# Altium PCB PCB1.PcbDoc
Units mm, origin at the board's own origin, x right, y up, seen from the top; angles counter-clockwise.
Board outline 49.15 x 59.31 mm, 2 copper layers (Top Layer, Bottom Layer); 22 components, 31 nets, 136 pads, 0 vias.
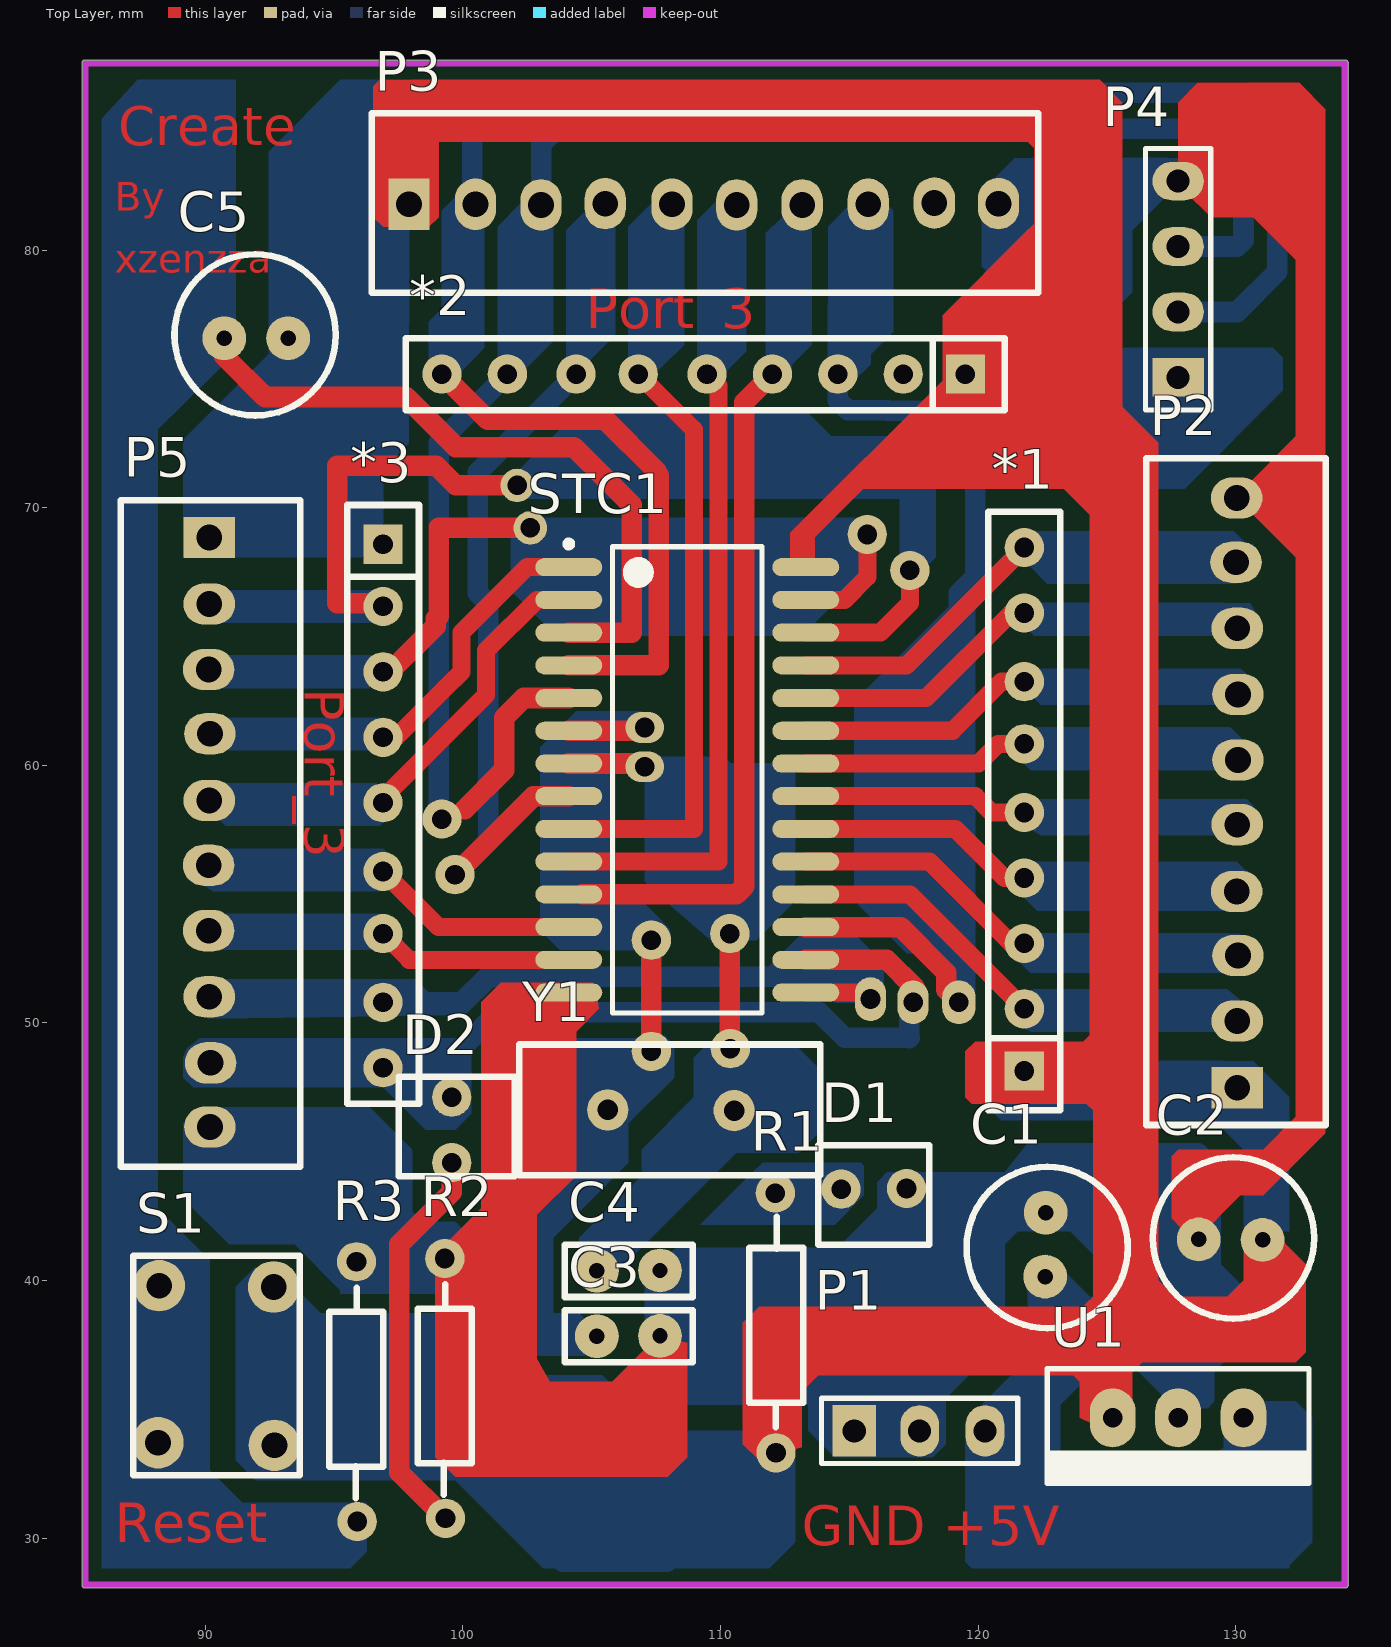
[diagram p0: Top Layer view]
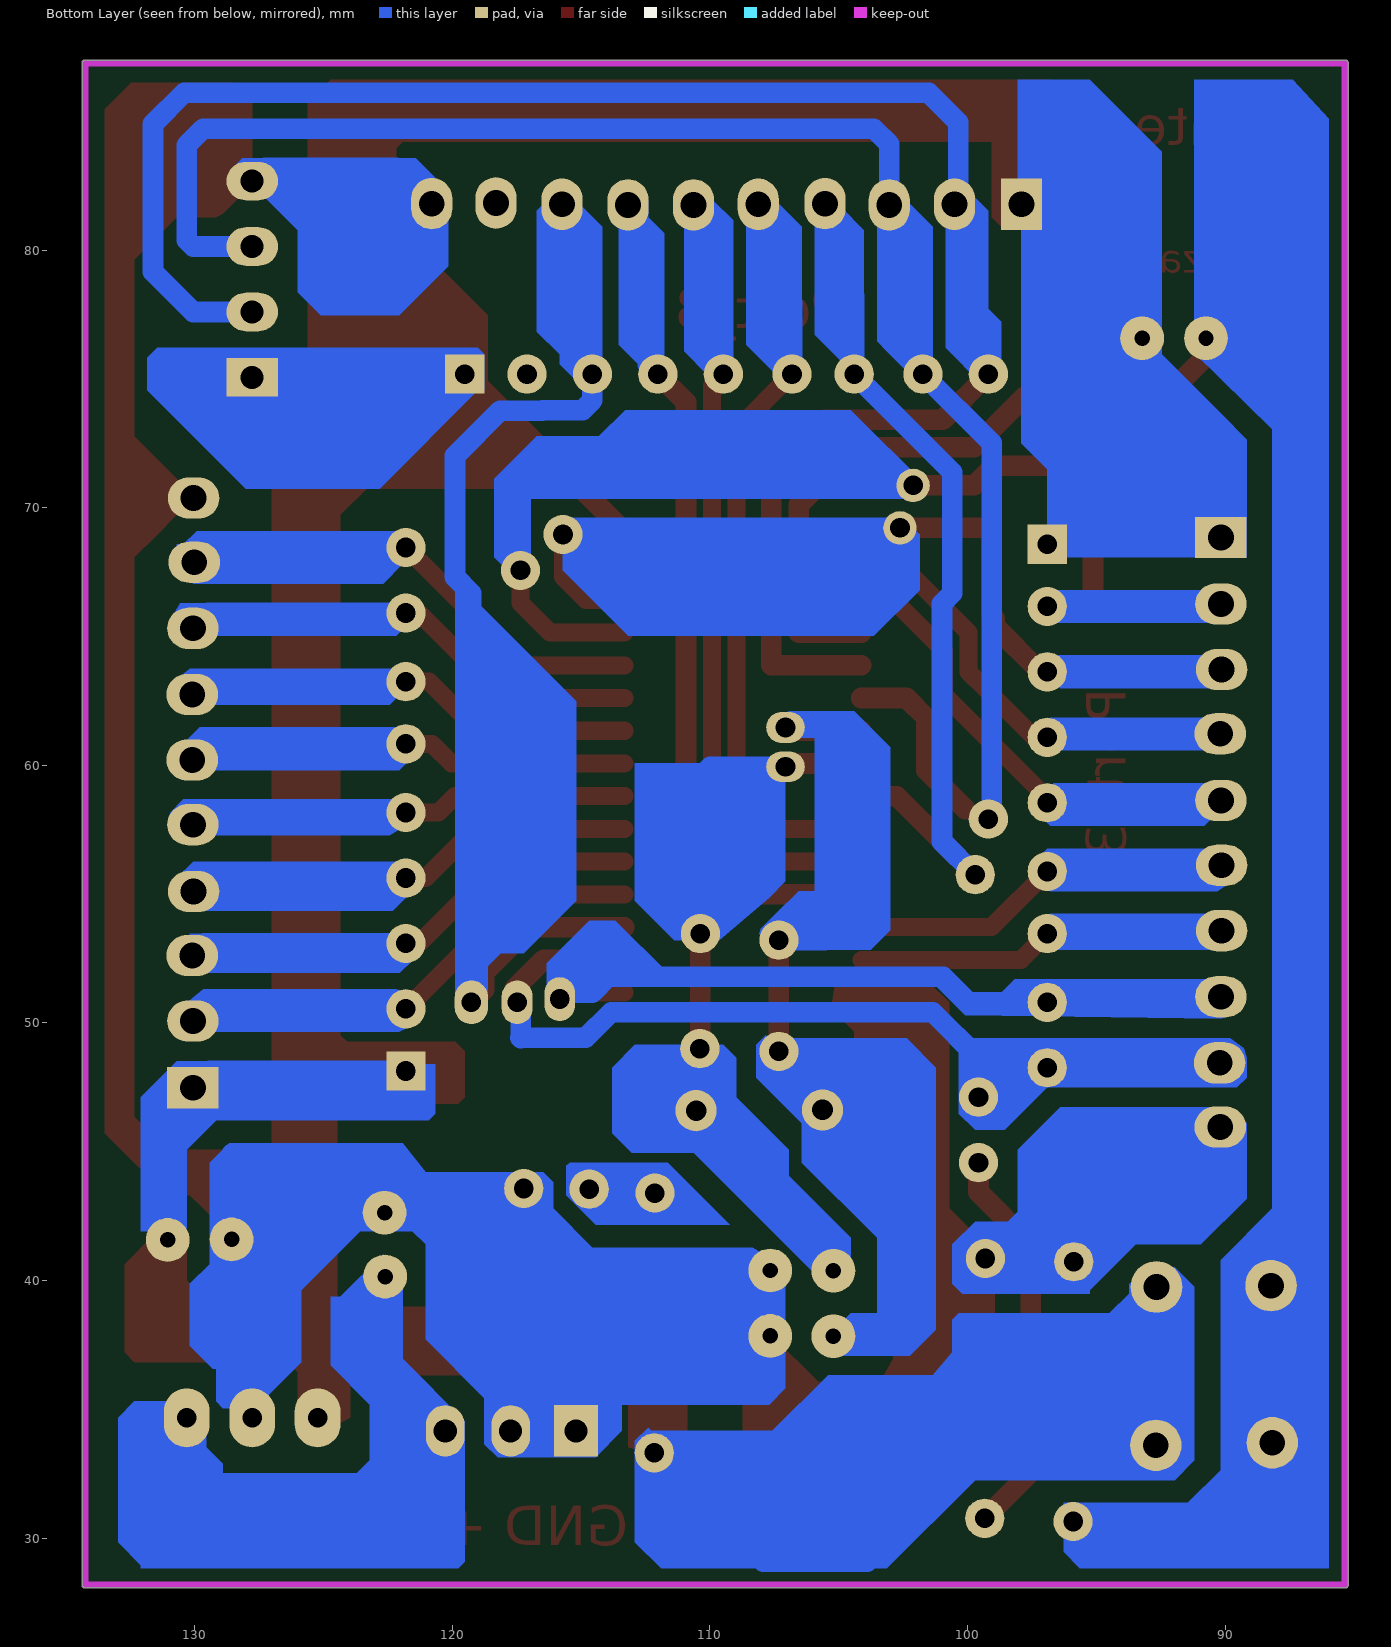
[diagram p1: Bottom Layer view, seen from below]
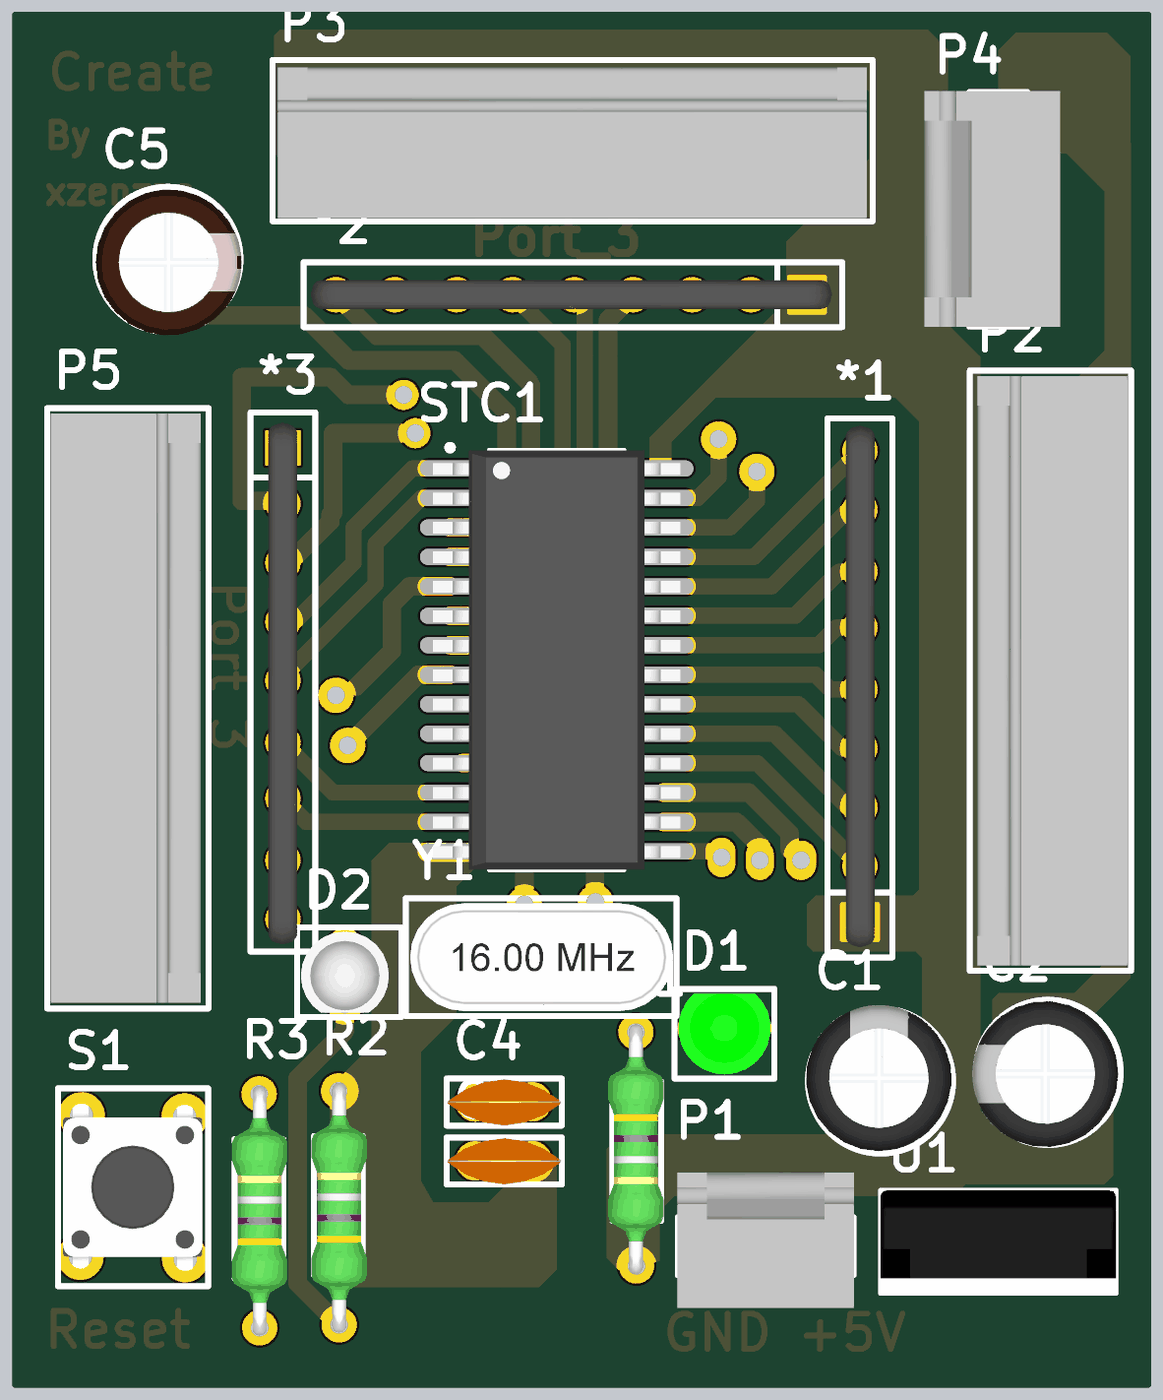
[diagram p2: 3D render of the assembled board from above, using the file's embedded part models]

## Layer stack, top to bottom
Top Solder: solder mask 0.0102, Solder Resist, Dk 3.5
Top Layer: signal copper 0.0356
Dielectric 1: dielectric 0.32, FR-4, Dk 4.8
Bottom Layer: signal copper 0.0356
Bottom Solder: solder mask 0.0102, Solder Resist, Dk 3.5

## Board outline
85.217,28.194 ccw(c85.344,28.194) 85.344,28.067 134.239,28.067 ccw(c134.239,28.194) 134.366,28.194 134.366,87.249 ccw(c134.239,87.249) 134.239,87.376 85.344,87.376 ccw(c85.344,87.249) 85.217,87.249

## Design rules (kind name [scope] priority, off if disabled: settings)
Clearance [All] p1: gap=0.254
PolygonConnect [All] p1: connectstyle=Relief reliefconductorwidth=0.254 reliefentries=4 polygonreliefangle="90 Angle" airgapwidth=0.254
RoutingVias [All] p1: holewidth=0.711 width=1.27 viastyle="Through Hole" minholewidth=0.711 minwidth=1.27 maxholewidth=0.711 maxwidth=1.27
SolderMaskExpansion [All] p1: expansion=0.102
Width [All] p1: maxlimit=1 minlimit=0.7 preferedwidth=0.9 toplayer_maxwidth=0.9 toplayer_prefwidth=0.8 bottomlayer_minwidth=0.8 minimp=50.000000 maximp=50.000000 favimp=50.000000
30 further rules are at their usual default settings.

## Components (designator, comment, footprint, x,y, rotation, side; value= is the part's Value field where it differs from the comment)
*1 "RES_Network" RES_NETWORK 121.793,58.293 r90 top
*2 "RES_Network" RES_NETWORK 109.347,75.184 r180 top
*3 "RES_Network" RES_NETWORK 96.901,58.42 r270 top
C1 "Cap Pol3" CAPA2.5EB 122.682,41.275 r270 top
C2 "Cap Pol3" CAPA2.5EB 129.921,41.656 r0 top
C3 "Cap" cap2.5mmceramic 106.426,37.846 r0 top
C4 "Cap" cap2.5mmceramic 106.426,40.386 r0 top
C5 "Cap Pol1" CAPA2.5EBR 91.948,76.708 r0 top
D1 "LED0" ledgreen 115.951,43.561 r180 top
D2 "LED0" ledred 99.568,45.847 r0 top
P1 "Header 3" HDR1X3_MTA 115.189,34.163 r0 top
P2 "Connector10" PIN10 130.048,58.928 r90 top
P3 "Connector10" PIN10 109.347,81.788 r0 top
P4 "Header 4" HDR1X4_MTA 127.762,75.057 r90 top
P5 "Connector10" PIN10 90.17,57.404 r270 top
R1 "Res1" RES- 112.141,38.354 r90 top
R2 "Res1" RES- 99.314,35.814 r270 top
R3 "Res1" RES- 95.885,35.687 r270 top
S1 "SW-SPST" SWITCHBUTTON 90.424,36.703 r90 top
STC1 "STC12C5608AD" SO28_M 108.712,59.436 r0 top
U1 "LT78XX" to220ab 127.762,34.671 r180 top
Y1 "XTAL" Crystal 108.077,46.609 r0 top

## Footprints (in the part's own frame and the unit in brackets; to place one, negate y for a bottom-side part, rotate by r counter-clockwise, add the part's x,y. Pads: shape width x height; smd on the part's side, far side on the other; paste and mask are expansions set on the pad)
cap2.5mmceramic [mm]
  round 1.7 hole 0.6: 1(1.225,0.005) 2(-1.225,-0.005)
  silkscreen extent -2.46,-1.02 2.51,1.01, body extent -2.43,-1.02 2.48,0.98, height 5.45
CAPA2.5EB [mm]
  round 1.7 hole 0.6: 1(1.12,-0.08) 2(-1.36,-0.06)
  silkscreen extent -3.14,-3.13 3.12,3.13, body extent -3.28,-3.22 3.02,3.08, height 2.7
CAPA2.5EBR [mm]
  round 1.7 hole 0.6: 1(1.27,-0.13) 2(-1.21,-0.13)
  silkscreen extent -3.14,-3.13 3.12,3.13, body extent -3.13,-3.27 3.17,3.01, height 2.5
Crystal [mm]
  round 1.6 hole 0.8: 1(2.454,-0.014) 2(-2.454,0.014)
  silkscreen extent -5.88,-2.53 5.8,2.55, body extent -5.68,-2.31 5.65,2.34, height 3.8
HDR1X3_MTA [mm] "Connector; Header; 3 Position"
  rect 1.7x2 hole 0.9: 1(0,0)
  oval 1.5x2 hole 0.9: 2(2.54,0) 3(5.08,0)
  silkscreen extent -1.27,-1.27 6.35,1.27, body extent -1.27,-2.66 6.35,3.18, height 2.86
HDR1X4_MTA [mm] "Connector; Header; 4 Position"
  rect 1.5x2 hole 0.9: 1(0,0)
  oval 1.5x2 hole 0.9: 2(2.54,0) 3(5.08,0) 4(7.62,0)
  silkscreen extent -1.27,-1.27 8.89,1.27, body extent -1.26,-2.66 8.9,3.18, height 10.03
ledgreen [mil]
  round 60 hole 30: 1(50,0.5) 2(-50,-0.5)
  silkscreen extent -85,-67 85,86, body extent -78,-59 78,79, height 212
ledred [mil]
  round 60 hole 30: 1(0,50) 2(0,-50)
  silkscreen extent -81,-71 96,81, body extent -75,-64 75,74, height 256
PIN10 [mm]
  rect 1.6x2 hole 1: 1(-11.443,-0.013)
  oval 1.6x2 hole 1: 2(-8.852,-0.013) 3(-6.312,-0.038) 4(-3.823,0.013) 5(-1.232,-0.013) 6(1.283,-0.038) 7(3.823,-0.038) 8(6.388,-0.013) 9(8.954,0.038) 10(11.443,0.013)
  silkscreen extent -12.89,-3.44 12.99,3.52, body extent -12.66,-3.29 12.74,3.19, height 3.1
RES- [mil]
  round 60 hole 30: 1(-198.5,-0.5) 2(198.5,0.5)
  silkscreen extent -159,-42 163,41, body extent -212,-47 211,48, height 95
RES_NETWORK [mil]
  rect 60x60 hole 30: 1(-400,0)
  round 60 hole 30: 2(-305,0) 3(-205,0) 4(-105,0) 5(-5,0) 6(100,0) 7(195,0) 8(300,0) 9(400,0)
  silkscreen extent -460,-55 455,55, body extent -443,-25 443,24, height 209
SO28_M [mm] "SOIC, 28-Leads, Body 17.9x7.5mm, Pitch 1.27mm, IPC Low Density"
  oval 2.6x0.7 smd: 1(-4.6,8.255) 2(-4.6,6.985) 3(-4.6,5.715) 4(-4.6,4.445) 5(-4.6,3.175) 6(-4.6,1.905) 7(-4.6,0.635) 8(-4.6,-0.635) 9(-4.6,-1.905) 10(-4.6,-3.175) 11(-4.6,-4.445) 12(-4.6,-5.715) 13(-4.6,-6.985) 14(-4.6,-8.255) 15(4.6,-8.255) 16(4.6,-6.985) 17(4.6,-5.715) 18(4.6,-4.445) 19(4.6,-3.175) 20(4.6,-1.905) 21(4.6,-0.635) 22(4.6,0.635) 23(4.6,1.905) 24(4.6,3.175) 25(4.6,4.445) 26(4.6,5.715) 27(4.6,6.985) 28(4.6,8.255)
  silkscreen extent -4.72,-9.05 2.9,9.28, body extent -5.34,-9.04 5.33,9.04, height 2.39
SWITCHBUTTON [mm]
  round 2 hole 1: 1(-2.997,2.261) 1(3.099,2.21) 2(-3.099,-2.261) 2(3.048,-2.235)
  silkscreen extent -4.27,-3.25 4.27,3.23, body extent -3.99,-3 3.99,3, height 4.9
to220ab [mil]
  oval 70x90 hole 30: 1(-100,0) 2(0,0) 3(100,0)
  silkscreen extent -200,-75 200,100, body extent -200,-75 200,75, height 750

## Part data
C1 C2: "Polarized Capacitor (Surface Mount)"
C3 C4: "Capacitor"
C5: "Polarized Capacitor (Radial)"
D1 D2: "Typical INFRARED GaAs LED"
P1: "Header, 3-Pin"
P2 P3 P5: "Header, 10-Pin"
P4: "Header, 4-Pin"
R1 R2 R3: "Resistor"
S1: "Single-Pole, Single-Throw Switch"
U1: library part 78XX
Y1: "Crystal Oscillator"

## Free pads (board coordinates)
  round 1.524 hole 0.762: 13(117.348,67.564) 17(107.315,53.213) 18(110.363,53.467) 21(99.695,55.753) 22(99.187,57.912) 23(115.697,68.961) 28(107.315,48.895) 29(110.384,49.001)
  oval 1.3x1.7 hole 0.762: 14(119.253,50.8)
  oval 1.2x1.7 hole 0.762: 15(115.824,50.927) 16(117.475,50.8)
  oval 1.5x1.2 hole 0.762: 19(107.061,59.944) 20(107.061,61.468)
  round 1.3 hole 0.762: 26(102.108,70.866) 27(102.616,69.215)

## Nets (pads, with @x,y where several pads share a name; then routed paths per layer and width w, separated by ;. In a path a pad name is that pad's centre, name@x,y a point inside that pad or via, vN(x,y) a via of type N, cw(c..) or ccw(c..) an arc to the next point about the centre after c; other vN are vias at no path point)
GND: C1.2 C2.2 C3.1 C4.1 D1.2 P1.1 P1.2 P2.10 P3.10 P4.4 P5.10 R2.1 R3.1 STC1.14 U1.2 | length 154.3
  Top Layer w0.7: STC1.14 103.759,50.828 103.759,45.314 R2.1 99.301,33.541 107.651,33.541
  Top Layer w0.8: 107.651,33.541 C3.1 ; P4.4 132.08,82.677 133.083,81.674 133.083,70.091 132.842,69.85 132.842,45.974 131.355,44.487 128.561,44.487 C2.2 ; P2.10 133.083,70.371
  Bottom Layer w0.8: P5.10 90.183,42.913 91.059,42.037 94.564,42.037 R3.1 95.999,40.856 R2.1 ; C4.1 C3.1 107.651,35.859 107.823,35.687 113.665,35.687 P1.1 P1.2 117.729,43.066 D1.2 117.462,43.574 118.401,42.635 C1.2 122.622,43.554 123.989,44.921 128.561,44.921 C2.2 127.762,40.797 U1.2 ; P3.10 122.174,83.185 127.254,83.185 P4.4
Net*1_2: *1.2 P2.2 STC1.18 | length 18.8
  Top Layer w0.7: STC1.18 117.348,54.991 *1.2
  Bottom Layer w0.8: *1.2 129.591,50.546 P2.2
Net*1_3: *1.3 P2.3 STC1.19 | length 18.3
  Top Layer w0.7: STC1.19 118.11,56.261 121.285,53.086 *1.3
  Bottom Layer w0.8: *1.3 129.616,53.086 P2.3
Net*1_4: *1.4 P2.4 STC1.20 | length 17.7
  Top Layer w0.7: STC1.20 119.126,57.531 121.031,55.626 *1.4
  Bottom Layer w0.8: *1.4 129.515,55.626 P2.4
Net*1_5: *1.5 P2.5 STC1.21 | length 17.2
  Top Layer w0.7: STC1.21 119.888,58.801 120.523,58.166 *1.5
  Bottom Layer w0.8: *1.5 129.591,58.166 P2.5
Net*1_6: *1.6 P2.6 STC1.22 | length 17.3
  Top Layer w0.7: STC1.22 120.015,60.071 120.777,60.833 *1.6
  Bottom Layer w0.8: *1.6 129.464,60.833 P2.6
Net*1_7: *1.7 P2.7 STC1.23 | length 17.8
  Top Layer w0.7: STC1.23 118.999,61.341 120.904,63.246 *1.7
  Bottom Layer w0.8: *1.7 129.591,63.246 P2.7
Net*1_8: *1.8 P2.8 STC1.24 | length 18.4
  Top Layer w0.7: STC1.24 117.983,62.611 121.285,65.913 *1.8
  Bottom Layer w0.8: *1.8 129.464,65.913 P2.8
Net*1_9: *1.9 P2.9 STC1.25 | length 18.8
  Top Layer w0.7: STC1.25 117.221,63.881 *1.9
  Bottom Layer w0.8: *1.9 129.438,68.453 P2.9
Net*2_3: *2.3 P3.8 pad.14 STC1.17 | length 43.3
  Top Layer w0.8: STC1.17 116.992,53.721 118.762,51.951 118.762,51.291 pad.14
  Bottom Layer w0.8: P3.8 115.735,79.032 114.554,77.851 *2.3 114.554,74.168 114.935,73.787 116.488,73.787 116.507,73.768 118.129,73.768 119.888,72.009 119.888,67.31 119.253,66.675 pad.14
Net*2_5: *2.5 P3.6 STC1.10 | length 25.8
  Top Layer w0.7: STC1.10 109.92,56.261 109.92,74.738 *2.5
  Bottom Layer w0.8: 109.728,78.486 110.363,79.121
Net*2_6: *2.6 P3.5 STC1.9 | length 30.5
  Top Layer w0.7: STC1.9 108.966,57.531 108.966,73.025 *2.6
  Bottom Layer w0.8: *2.6 106.807,77.978 108.115,79.286 P3.5
Net*2_7: *2.7 P3.4 pad.21 STC1.8 | length 34.5
  Top Layer w0.8: pad.21 102.743,58.801 STC1.8
  Bottom Layer w0.8: pad.21 100.984,57.042 100.984,66.275 100.584,66.675 100.584,71.374 *2.7 104.394,78.232 105.524,79.362 P3.4
Net*2_8: *2.8 P3.3 P4.3 pad.22 STC1.5 | length 69
  Top Layer w0.8: 100.076,58.293 101.6,59.817 101.6,61.849 102.362,62.611 STC1.5
  Bottom Layer w0.8: pad.22 99.06,58.42 99.06,72.517 *2.8 102.108,75.565 102.108,77.597 103.035,78.524 P3.3 103.035,84.112 103.632,84.709 129.667,84.709 130.302,84.074 130.302,80.391 130.048,80.137 P4.3
Net*2_9: *2.9 P3.2 P4.2 STC1.4 | length 69.6
  Top Layer w0.8: *2.9 100.965,73.406 105.537,73.406 107.505,71.438 ; STC1.4 107.607,63.881 107.607,71.247
  Bottom Layer w0.8: *2.9 99.187,76.962 100.203,77.978 ; P3.2 100.362,81.908 100.362,84.963 101.505,86.106 130.396,86.106 131.61,84.892 131.61,79.159 130.048,77.597 P4.2
Net*3_2: *3.2 P5.2 pad.13 pad.26 STC1.26 | length 45.3
  Top Layer w0.7: STC1.26 116.205,65.151 117.348,66.294 pad.13
  Top Layer w0.8: *3.2 96.774,66.294 95.123,66.294 95.123,71.628 98.966,71.628 99.728,70.866 pad.26
  Bottom Layer w0.8: P5.2 96.812,66.256 *3.2 ; pad.26 102.235,70.739 117.094,70.739 117.348,70.485 pad.13
Net*3_3: *3.3 P5.3 pad.23 pad.27 STC1.27 | length 34.6
  Top Layer w0.7: STC1.27 114.808,66.421 115.697,67.31 pad.23
  Top Layer w0.8: *3.3 97.167,63.627 98.945,65.405 98.945,65.682 99.06,65.797 99.06,69.215 pad.27
  Bottom Layer w0.8: P5.3 96.812,63.716 *3.3 ; pad.27 115.443,69.215 pad.23
Net*3_4: *3.4 P5.4 STC1.1 | length 17.4
  Top Layer w0.7: *3.4 97.409,61.087 99.314,62.992 99.949,63.627 99.949,65.151 102.489,67.691 STC1.1
  Bottom Layer w0.8: P5.4 95.745,61.227 95.758,61.214 *3.4@96.774,61.214
Net*3_5: *3.5 P5.5 STC1.2 | length 18.4
  Top Layer w0.7: *3.5 96.901,58.722 100.903,62.724 100.903,64.454 102.87,66.421 STC1.2
  Bottom Layer w0.8: P5.5 96.812,58.636 *3.5
Net*3_6: *3.6 P5.6 STC1.12 | length 15
  Top Layer w0.7: *3.6 99.06,53.721 STC1.12
  Bottom Layer w0.8: P5.6 96.66,56.121 *3.6
Net*3_7: *3.7 P5.7 STC1.13 | length 14.4
  Top Layer w0.7: *3.7 97.917,52.451 STC1.13
  Bottom Layer w0.8: P5.7 96.787,53.581 *3.7
Net*3_8: *3.8 P5.8 pad.15 STC1.15 | length 29
  Top Layer w0.7: STC1.15 115.57,51.181 pad.15
  Bottom Layer w0.8: P5.8 *3.8@96.685,51.016 ; *3.8 99.949,50.8 100.946,51.797 113.938,51.797 114.554,51.181 115.824,51.181 pad.15
Net*3_9: *3.9 D2.1 P5.9 pad.16 STC1.16 | length 37.1
  Top Layer w0.8: STC1.16 116.45,52.451 117.547,51.354 pad.16
  Bottom Layer w0.8: P5.9 90.399,48.26 *3.9 98.425,48.26 D2.1 99.568,48.641 101.346,50.419 113.825,50.419 114.821,49.423 117.348,49.423 ; 117.332,49.403 117.332,50.768 pad.16
NetC1_1: C1.1 P1.3 U1.1 | length 22.3
  Bottom Layer w0.8: C1.1 122.602,37.004 120.269,34.671 P1.3 120.269,31.75 130.175,31.75 130.302,31.877 U1.1
NetC3_2: C3.2 pad.17 pad.20 pad.28 STC1.6 Y1.2 | length 35.2
  Top Layer w0.8: STC1.6 pad.20@106.934,61.341 ; pad.28@107.315,48.641 pad.17
  Bottom Layer w0.8: C3.2 102.367,37.841 102.367,41.788 105.623,45.044 Y1.2 107.315,48.315 pad.28@107.315,49.238 ; pad.20 105.537,61.468 105.537,53.213 pad.17
NetC4_2: C4.2 pad.18 pad.19 pad.29 STC1.7 Y1.1 | length 28.4
  Top Layer w0.8: STC1.7 106.934,60.071 pad.19 ; pad.29@110.363,49.022 pad.18
  Bottom Layer w0.8: C4.2 105.201,41.701 110.095,46.595 Y1.1 110.531,48.854 pad.29 pad.29@110.236,49.149 ; pad.19 109.982,59.944 110.363,59.563 pad.18
NetC5_2: C5.2 R3.2 S1.1 STC1.3 | length 83.5
  Top Layer w0.8: C5.2 90.738,75.879 92.322,74.295 97.79,74.295 99.733,72.352 104.305,72.352 106.553,70.104 106.553,65.151 STC1.3
  Bottom Layer w0.8: C5.2 88.389,76.578 86.487,74.676 86.487,41.529 88.214,39.802 88.214,33.757 88.163,33.706 88.163,31.902 89.916,30.15 95.402,30.15 R3.2
NetD1_1: D1.1 R1.2 | length 2.6
  Bottom Layer w0.8: R1.2 112.281,43.548 D1.1
NetD2_2: D2.2 R2.2 | length 15.4
  Top Layer w0.8: R2.2 97.536,32.563 97.536,41.402 99.568,43.434 D2.2
NetP3_7: *2.4 P3.7 STC1.11 | length 30.5
  Top Layer w0.8: STC1.11@104.644,54.991 110.617,54.991 110.924,55.298 110.924,74.094 *2.4
  Bottom Layer w0.8: *2.4 112.395,75.565 112.395,78.74
VCC: *1.1 *2.1 *3.1 C2.1 C5.1 P2.1 P3.1 P4.1 P5.1 R1.1 S1.2 STC1.28 U1.3 | length 207.9
  Top Layer w0.7: R1.1 112.154,37.211 113.17,38.227 125.222,38.227 U1.3 125.222,37.465 125.73,37.973 125.857,38.1 130.302,38.1 131.041,38.839 C2.1 ; STC1.28 113.312,68.989 *2.1
  Top Layer w0.8: P3.1 97.904,85.966 123.558,85.966 123.558,74.943 ; *2.1 119.748,74.943 123.558,74.943 ; *1.1 125.73,48.133 ; 125.73,37.973 125.73,48.133 ; 123.558,74.943 125.73,72.771 125.73,48.133
  Bottom Layer w0.8: P5.1 93.218,68.847 ; S1.2@92.659,39.751 92.659,33.63 92.685,33.604 95.021,35.941 97.028,35.941 103.886,29.083 107.925,29.083 108.331,29.489 108.401,29.489 109.282,30.37 109.282,30.44 R1.1 ; *3.1 96.634,68.847 93.218,68.847 ; P3.1 94.475,81.775 93.218,80.518 C5.1 93.218,68.847 ; *2.1 119.634,75.057 P4.1 ; *1.1 129.413,48.133 P2.1 131.041,46.505 C2.1
pads on no net: *2.2 P3.9

## Keep-outs
Keep-Out Layer:
  lines w0.254: 85.344,28.194 85.344,87.249 134.239,87.249 134.239,28.194 85.344,28.194

## Other copper
Top Layer:
  region net GND: 105.156,51.435 105.029,51.562 101.473,51.562 100.711,50.8 100.711,49.784 100.711,42.799 98.933,41.021 98.933,33.147 99.695,32.385 107.95,32.385 108.712,33.147 108.712,37.592 107.569,37.846 105.791,36.068 103.378,36.068 102.87,36.957 102.87,37.338 102.87,42.545 104.394,44.069 104.394,49.657 105.283,50.546
  region net VCC: 111.506,33.02 110.871,33.655 110.871,38.354 111.506,38.989 111.76,38.989 124.079,38.989 124.206,39.116 124.46,39.37 124.46,39.624 124.46,46.609 124.206,46.863 119.761,46.863 119.507,47.117 119.507,48.895 119.888,49.276 124.079,49.276 124.333,49.53 124.333,69.723 123.317,70.739 115.189,70.739 113.665,69.215 112.713,67.627 112.712,69.025 118.618,74.93 118.618,77.47 121.793,80.645 122.174,81.026 122.174,83.947 121.92,84.201 121.666,84.201 99.06,84.201 99.06,81.28 98.679,80.899 96.901,80.899 96.52,81.28 96.52,86.36 96.774,86.614 124.714,86.614 125.603,85.725 125.603,85.217 125.603,73.914 127,72.517 127,40.259 127,40.005 127.635,39.37 129.667,39.37 130.302,40.005 130.302,41.402 131.191,41.402 131.572,41.783 132.715,40.64 132.715,37.465 132.715,37.211 132.334,36.83 126.365,36.83 125.984,36.449 125.984,34.29 125.095,33.655 124.46,34.417 123.952,34.671 123.952,36.068 123.698,36.322 113.792,36.322 113.157,35.687 113.157,35.179 113.157,33.528
  region net GND: 127.762,82.677 127.762,85.725 128.524,86.487 132.461,86.487 133.477,85.471 133.477,85.217 133.477,45.72 133.223,45.466 131.064,43.307 130.175,43.307 129.667,42.799 128.905,42.037 127.889,42.037 127.508,42.418 127.508,44.831 127.762,45.085 131.064,45.085 132.334,46.355 132.334,68.072 131.509,68.898 130.683,69.723 130.302,70.104 130.302,70.739 132.334,72.771 132.334,79.629 130.683,81.28 129.159,81.28 128.905,81.407 128.143,82.169
  text "Create" at 86.614,84.074 h1.5
  text "By" at 86.487,81.534 h1.1
  text "xzenzza" at 86.487,79.121 h1.1
  text "Port_3" at 104.775,76.962 h1.52
  text "Port_3" at 93.853,62.992 h1.52 r270
  text "Reset" at 86.487,29.845 h1.52
  text "GND +5V" at 113.157,29.718 h1.52
Bottom Layer:
  region net VCC: 121.793,48.133 121.539,48.387 120.65,48.387 120.65,46.482 120.904,46.228 122.047,46.228 122.936,46.228 123.571,46.228 124.206,46.228 129.159,46.228 130.302,45.085 130.302,42.037 131.064,41.275 131.699,41.91 132.08,41.91 132.08,47.117 130.683,48.514 122.174,48.514
  region net NetC4_2: 107.061,59.944 107.061,55.499 107.696,54.864 108.585,54.102 109.622,53.213 109.728,53.213 111.379,53.213 112.903,54.737 112.903,60.071 106.934,60.071
  region net NetC3_2: 107.315,61.849 106.934,62.103 104.394,62.103 102.997,60.706 102.997,53.594 103.759,52.832 107.188,52.832 107.95,53.213 108.077,53.467 108.013,53.657 107.442,54.229 106.553,55.118 105.537,55.118 105.537,61.087 105.664,61.214
  region net Net*3_3: 102.616,69.596 101.854,68.961 101.854,66.802 103.632,65.024 113.157,65.024 115.697,67.564 115.697,69.342 115.443,69.596
  region net VCC: 97.904,81.775 97.917,81.763 97.904,72.504 96.901,71.501 96.901,70.993 96.901,68.326 96.52,67.945 96.139,68.072 89.154,68.072 89.154,71.882 89.154,72.644 90.17,73.66 90.678,74.168 92.456,75.946 92.456,83.82 95.25,86.614 98.044,86.614 98.044,86.36 98.044,81.915
  region net NetC5_2: 90.738,76.578 91.059,76.454 91.186,76.01 88.163,73.05 88.163,72.746 88.163,42.799 90.17,40.792 90.17,32.639 91.44,31.369 96.266,31.369 96.266,29.464 95.631,28.829 85.979,28.829 85.979,85.09 87.376,86.614 91.059,86.614 91.186,86.614 91.186,76.962 90.932,76.708
  region net VCC: 92.583,40.513 91.948,40.513 91.186,39.751 91.186,33.02 91.948,32.258 92.71,32.258 99.695,32.258 103.124,28.829 111.887,28.829 112.903,29.845 112.903,33.782 112.395,34.29 112.268,34.163 107.569,34.163 105.41,36.322 101.346,36.322 100.584,37.211 100.584,38.481 100.33,38.735 99.314,38.735 94.488,38.735 93.726,39.497 93.726,39.878
  region net GND: 96.393,46.736 98.044,45.085 98.044,42.672 98.425,42.291 99.695,42.291 100.584,41.402 100.584,39.878 100.203,39.497 95.25,39.497 95.25,39.624 93.472,41.402 90.932,41.402 89.154,43.18 89.154,46.101 89.789,46.736
  region net NetC3_2: 102.362,49.403 101.219,48.26 101.219,38.1 102.235,37.084 104.902,37.084 104.902,38.354 104.521,38.735 103.505,38.735 103.505,41.656 106.426,44.577 106.426,46.101 108.204,47.879 108.204,49.149 107.823,49.53 107.696,49.403
  region net NetC4_2: 104.521,40.767 105.156,40.132 105.537,40.513 105.664,40.259 105.791,40.132 106.172,40.513 110.617,44.958 113.03,44.958 113.792,45.72 113.792,48.26 112.903,49.149 112.649,49.149 109.474,49.149 108.966,48.641 108.966,47.117 106.934,45.085 106.934,44.069 104.521,41.656
  region net GND: 107.061,40.513 107.061,35.814 107.696,35.179 113.411,35.179 113.411,34.163 114.427,33.147 118.237,33.147 118.745,33.655 118.745,35.433 121.031,37.719 121.031,41.402 121.539,41.91 123.571,41.91 125.857,39.624 125.857,36.83 127.127,35.56 127.127,35.052 128.905,35.052 129.159,35.306 129.159,36.576 129.286,36.576 130.175,37.465 130.175,39.878 129.413,40.64 129.413,44.577 128.651,45.339 123.698,45.339 121.92,45.339 121.031,44.196 116.459,44.196 116.078,43.815 116.078,42.799 114.554,41.275 108.331,41.275
  region net NetD1_1: 109.474,42.418 109.22,42.164 114.427,42.164 115.57,43.307 115.57,44.45 115.443,44.577 111.633,44.577 111.252,44.196
  region net NetC1_1: 122.682,41.021 124.333,39.37 124.714,39.37 124.714,36.703 123.19,35.179 123.19,33.02 123.698,32.512 128.905,32.512 128.905,32.893 129.54,33.528 129.54,34.671 130.175,35.306 132.334,35.306 132.969,34.671 132.969,29.845 132.08,28.956 132.08,28.829 119.761,28.829 119.507,29.083 119.507,34.544 121.92,36.957 121.92,40.386
  region net VCC: 118.745,74.549 118.999,74.549 122.809,70.739 128.016,70.739 131.826,74.549 131.826,75.565 131.826,75.819 131.445,76.2 118.999,76.2 118.745,75.946
  region net GND: 120.015,82.169 120.142,82.042 120.142,79.375 122.047,77.47 125.095,77.47 125.984,78.359 125.984,80.772 127.381,82.169 128.397,82.169 128.397,83.312 128.143,83.566 121.412,83.566
  region net Net*2_3: 115.57,82.423 115.062,81.788 114.173,80.899 114.173,74.803 115.062,74.803 115.824,75.565 115.824,75.946 116.713,76.835 116.713,81.534 116.205,82.042
  region net Net*2_6: 107.315,81.788 106.426,80.899 106.426,75.184 107.315,75.057 107.823,75.565 108.585,76.327 108.585,81.534
  region net Net*2_7: 104.902,81.661 104.013,80.772 104.013,75.184 104.14,75.057 104.267,75.184 104.775,75.184 104.775,75.565 105.918,76.708 105.918,81.407
  region net Net*2_8: 102.235,81.788 101.346,80.899 101.346,74.803 101.854,74.803 102.87,75.819 103.124,76.073 103.505,76.454 103.505,81.28
  region net Net*2_9: 99.822,82.169 99.187,81.534 99.187,77.724 98.679,77.216 98.679,75.184 99.822,75.184 100.457,75.819 100.838,76.2 100.838,76.962 100.838,81.534
  region net Net*3_2: 102.108,70.485 101.536,70.802 104.521,73.787 113.284,73.787 114.3,72.771 116.713,72.771 118.364,71.12 118.364,68.072 117.856,67.564 117.729,67.564 117.348,67.945 117.348,70.485
  region net NetP3_7: 112.395,81.915 112.395,81.28 111.76,80.645 111.76,75.438 112.649,75.438 113.538,76.327 113.538,81.28
  region net Net*2_5: 109.855,81.915 109.093,81.153 109.093,75.184 110.109,75.184 110.998,76.073 110.998,81.788
  region net Net*3_9: 89.789,49.403 90.297,49.403 99.949,49.403 100.33,49.022 100.33,46.482 99.695,45.847 98.552,45.847 96.901,47.498 89.535,47.498 89.154,47.879 89.154,48.641 89.281,49.022
  region net Net*3_8: 90.17,50.165 100.076,50.292 101.346,51.562 101.346,51.816 100.838,52.07 99.949,51.181 98.679,51.181 98.171,51.689 89.916,51.689 89.789,50.292
  region net Net*3_7: 90.075,52.832 97.028,52.832 97.536,53.34 96.774,54.102 96.774,54.229 90.551,54.229 90.449,54.331
  region net Net*3_6: 89.916,56.769 90.043,56.769 90.17,56.896 90.297,56.769 96.901,56.769 97.282,56.388 97.155,56.261 97.028,55.372 96.774,55.118 90.805,55.118 90.297,55.118 89.916,55.372 90.17,55.753
  region net Net*3_5: 90.157,58.636 90.157,58.306 90.805,57.658 96.774,57.658 97.028,57.912 97.028,58.928 96.647,59.309 90.551,59.309 90.424,59.182
  region net Net*3_4: 90.17,60.579 90.297,60.579 90.424,60.579 90.551,60.579 96.774,60.579 97.409,61.214 96.774,61.849 90.424,61.849 90.297,61.722
  region net Net*3_3: 90.551,62.992 96.393,62.992 96.393,63.119 96.901,63.627 96.901,64.262 90.424,64.262
  region net Net*3_2: 90.297,65.659 90.424,65.532 96.774,65.532 97.155,65.913 96.901,66.167 96.774,66.802 90.424,66.802 90.043,66.421
  region net Net*1_2: 121.666,51.181 122.174,51.308 129.667,51.308 130.429,50.673 130.048,49.784 129.667,49.657 128.905,49.657 122.047,49.657 121.539,49.911 121.539,50.419
  region net Net*1_3: 121.528,52.44 122.026,51.943 130.175,51.943 130.175,53.467 121.92,53.467 121.793,53.34
  region net Net*1_4: 122.047,56.261 130.048,56.261 130.683,55.626 130.429,55.372 130.175,54.356 122.301,54.356 121.539,55.118
  region net Net*1_5: 121.92,57.912 121.793,57.658 122.428,57.277 129.642,57.277 130.937,57.404 130.937,58.166 130.429,58.674 122.047,58.674 121.793,58.166
  region net Net*1_6: 129.667,59.817 122.047,59.817 121.285,60.579 122.174,61.468 129.794,61.468 130.81,60.452
  region net Net*1_7: 121.92,62.865 122.428,62.357 129.794,62.357 130.81,63.246 130.175,63.754 122.047,63.754 121.92,63.754
  region net Net*1_8: 121.793,65.405 122.174,65.024 129.667,65.024 130.937,65.659 130.556,66.294 121.92,66.294 121.793,66.167
  region net Net*1_9: 121.92,67.818 122.682,67.056 130.048,67.056 130.683,67.691 130.683,68.58 130.429,68.58 129.921,69.088 121.92,69.088
  region net Net*2_3: 119.634,67.818 119.634,66.929 115.189,62.484 115.189,54.737 117.221,52.705 118.11,52.705 118.618,52.197 118.618,51.181 119.888,51.181 119.888,67.437
  region net Net*3_8: 116.332,51.054 116.332,52.324 114.935,53.721 114.681,53.975 113.665,53.975 111.633,51.943